# Altium PCB dsPIC33_CPU_ETH100(64)_Unit.PcbDoc
Units mm, origin at the board's own origin, x right, y up, seen from the top; angles counter-clockwise.
Board outline 83.82 x 124.46 mm, 2 copper layers (Top Layer, Bottom Layer); 43 components, 105 nets, 350 pads, 189 vias.
Unrouted connection lines stored in the file: 3.
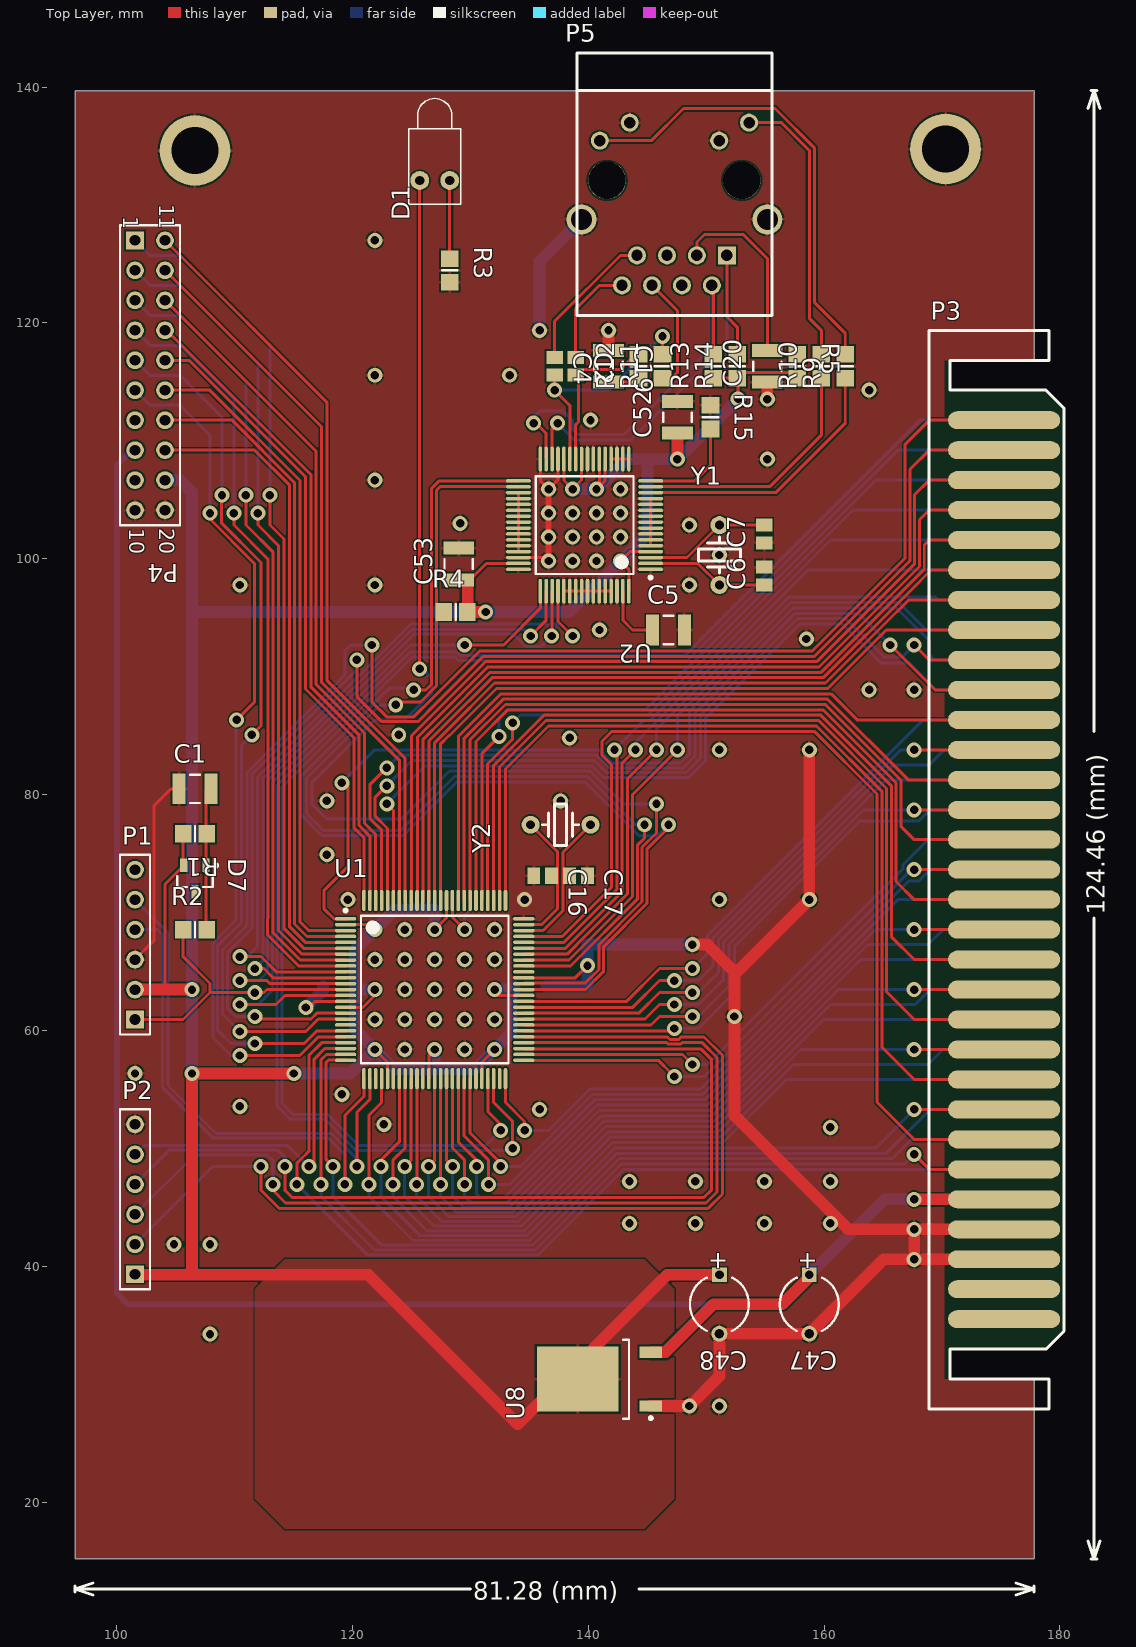
[diagram p0: Top Layer view]
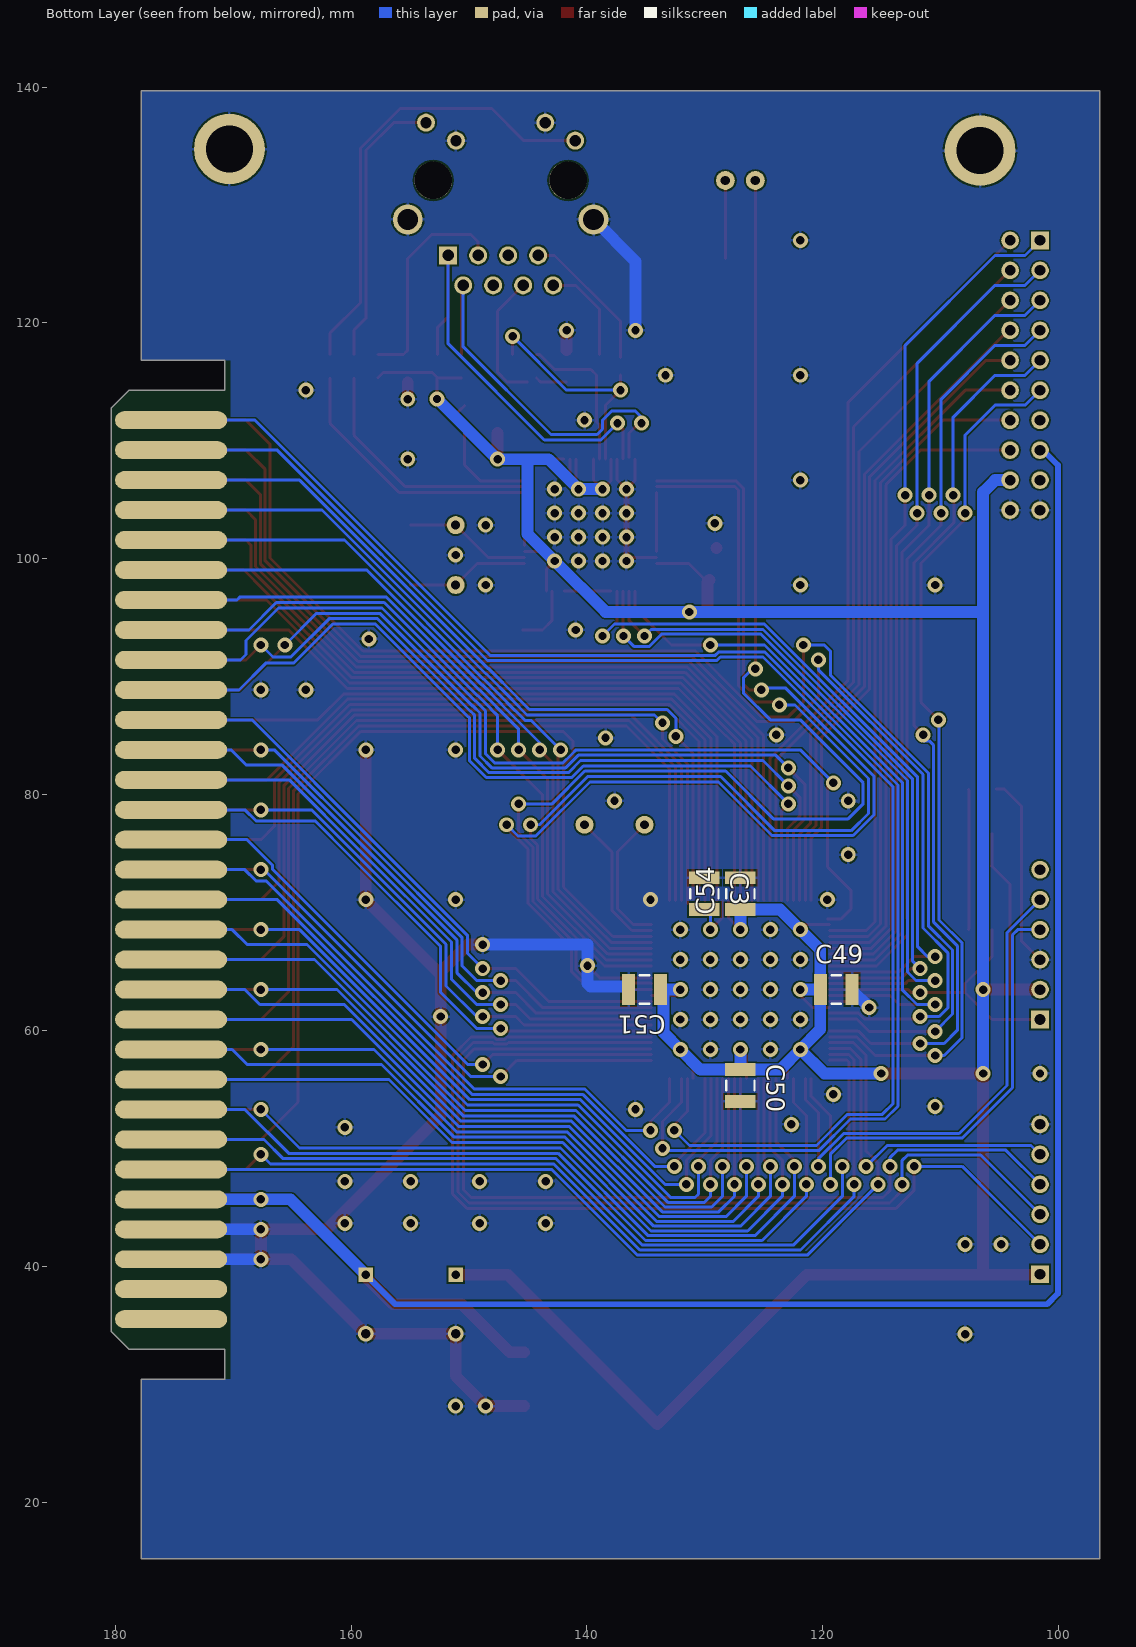
[diagram p1: Bottom Layer view, seen from below]

## Layer stack, top to bottom
Top Layer: signal copper 0.0356
Dielectric: core 0.32, FR-4, Dk 4.8
Bottom Layer: signal copper 0.0356

## Board outline
177.8,139.7 177.8,116.84 170.688,116.84 170.688,114.3 178.816,114.3 180.34,112.776 180.34,34.544 178.816,33.02 170.688,33.02 170.688,30.48 177.8,30.48 177.8,15.24 96.52,15.24 96.52,139.7

## Design rules (kind name [scope] priority, off if disabled: settings)
Clearance [All] p1: gap=0.15
PolygonConnect [All] p1: connectstyle=Relief reliefconductorwidth=0.254 reliefentries=4 polygonreliefangle="90 Angle"
RoomDefinition dsPIC33_CPU_ETH100(64)_Unit [InComponentClass('dsPIC33_CPU_ETH100(64)_Unit')] p1: confinementstyle=ConfineOut formatcopy=TRUE lockcomponents=FALSE outline 181.356,16.764 200.914,16.764 200.914,22.352 181.356,22.352
RoutingVias [All] p1: holewidth=0.711 width=1.27 viastyle="Through Hole" minholewidth=0.3 minwidth=0.8 maxholewidth=0.711 maxwidth=1.27
SMDNeckDown [All] p1: percent=200.000
SilkscreenOverComponentPads [All] p1: minsilkscreentomaskgap=0.254
SolderMaskExpansion [All] p1: expansion=0.102
Width [All] p1: maxlimit=1 minlimit=0.15 preferedwidth=0.254
27 further rules are at their usual default settings.

## Components (designator, comment, footprint, x,y, rotation, side; value= is the part's Value field where it differs from the comment)
C1 "Cap" CAPC3225L 106.68,80.518 r0 top
C2 "Cap" CAPC2012L 138.938,116.332 r270 top
C3 "Cap" CAPC3225L 130.048,71.628 r270 bottom
C4 "Cap" CAPC2012L 137.16,116.332 r270 top
C5 "Cap" CAPC3225L 146.812,93.98 r0 top
C6 "Cap" CAPC2012L 154.94,98.552 r90 top
C7 "Cap" CAPC2012L 154.94,102.108 r90 top
C16 "Cap" CAPC2012L 136.144,73.152 r0 top
C17 "Cap" CAPC2012L 139.192,73.152 r0 top
C19 "Cap" CAPC3225L 141.732,116.332 r270 top
C20 "Cap" CAPC3225L 155.194,116.332 r90 top
C47 "Cap Pol1" CAPPR5-5x5 158.75,36.83 r270 top
C48 "Cap Pol1" CAPPR5-5x5 151.13,36.83 r270 top
C49 "Cap" CAPC3225L 118.872,63.5 r180 bottom
C50 "Cap" CAPC3225L 127,55.372 r270 bottom
C51 "Cap" CAPC3225L 135.128,63.5 r0 bottom
C52 "Cap" CAPC3225L 147.574,112.014 r90 top
C53 "Cap" CAPC3225L 129.032,99.568 r90 top
C54 "Cap" CAPC3225L 127,71.628 r90 bottom
D1 "LED1" LED-1 127,132.08 r90 top
D7 "Diode" SOT95P240-3N 106.68,72.898 r270 top
P1 "Программатор" HDR1X6 101.6,60.96 r90 top
P2 "SPI" HDR1X6 101.6,39.37 r90 top
P3 "31x2 Slot" SL-62 180.34,33.02 r90 top
P4 "Header 10X2A" HDR2X10_CEN 101.6,127 r270 top
P5 "LU1T516-43" EthernetCON 147.32,132.08 r90 top
R1 "Res2" RESC2012M 106.68,76.708 r180 top
R2 "Res2" RESC2012M 106.68,68.58 r0 top
R3 "Res2" RESC2012M 128.27,124.46 r270 top
R4 "Res2" RESC2012M 128.778,95.504 r180 top
R5 "Res2" RESC2012M 157.734,116.332 r270 top
R9 "Res2" RESC2012M 161.798,116.332 r90 top
R10 "Res2" RESC2012M 159.766,116.332 r90 top
R11 "Res2" RESC2012M 146.304,116.332 r90 top
R12 "Res2" RESC2012M 144.272,116.332 r90 top
R13 "Res2" RESC2012M 150.622,116.332 r90 top
R14 "Res2" RESC2012M 152.654,116.332 r90 top
R15 "Res2" RESC2012M 150.368,112.014 r270 top
U1 "DSPIC33FJ256MC710T-I/PF" TQFP-PF100_N 127,63.5 r0 top
U2 "ENC624J600" TQFP-64_M 139.7,102.87 r180 top
U8 "LM1117DT-3.3" TD03B_N 140.97,30.48 r180 top
Y1 "XTAL" Quartz 151.13,97.79 r90 top
Y2 "XTAL" Quartz 140.208,77.47 r180 top

## Footprints (in the part's own frame and the unit in brackets; to place one, negate y for a bottom-side part, rotate by r counter-clockwise, add the part's x,y. Pads: shape width x height; smd on the part's side, far side on the other; paste and mask are expansions set on the pad)
CAPC2012L [mm] "Chip Capacitor, Body 2.0x1.3mm, IPC High Density"
  rect 1.1x1.4 smd: 1(-0.75,0) 2(0.75,0)
  body extent -1.1,-0.72 1.1,0.72, height 1.4
CAPC3225L [mm] "Chip Capacitor, Body 3.2x2.5mm, IPC High Density"
  rect 1.1x2.6 smd: 1(-1.35,0) 2(1.35,0)
  silkscreen extent -0.4,-1.2 0.4,1.2, body extent -1.7,-1.35 1.7,1.35, height 1.5
CAPPR5-5x5 [mm] "Capacitor, Electrolytic, Radial; Body 5 x 5 mm (Dia.xH typ); Pin Spacing 5 mm (typ)"
  rect 1.25x1.25 hole 0.75: 1(-2.5,0)
  round 1.35 hole 0.8: 2(2.5,0)
  silkscreen extent -2.26,-2.5 2.27,2.5
EthernetCON [mil] "Ethernet connector w/two LEDs"
  rect 60x60 hole 38: 1(-250,-175)
  round 60 hole 38: 2(-350,-125) 3(-250,-75) 4(-350,-25) 5(-250,25) 6(-350,75) 7(-250,125) 8(-350,175) 9(193,-249) 10(133,-149) 11(193,149) 12(133,249)
  round 100 hole 70: 13(-130,-310) 14(-130,310)
  round 125 hole 125 unplated: 15(0,-225) 16(0,225)
  silkscreen extent -450,-325 425,325, body extent -450,-325 433,325, height 550
HDR1X6 [mm] "Connector; Header; 6 Position"
  rect 1.5x1.5 hole 0.9: 1(0,0)
  round 1.5 hole 0.9: 2(2.54,0) 3(5.08,0) 4(7.62,0) 5(10.16,0) 6(12.7,0)
  silkscreen extent -1.27,-1.27 13.97,1.27
HDR2X10_CEN [mm] "Connector; Header; 10x2 Position"
  rect 1.5x1.5 hole 0.9: 1(0,0)
  round 1.5 hole 0.9: 2(2.54,0) 3(5.08,0) 4(7.62,0) 5(10.16,0) 6(12.7,0) 7(15.24,0) 8(17.78,0) 9(20.32,0) 10(22.86,0) 11(0,2.54) 12(2.54,2.54) 13(5.08,2.54) 14(7.62,2.54) 15(10.16,2.54) 16(12.7,2.54) 17(15.24,2.54) 18(17.78,2.54) 19(20.32,2.54) 20(22.86,2.54)
  silkscreen extent -1.27,-1.27 24.13,3.81
LED-1 [mm] "Typical RED GaAs LED; 2 Leads"
  round 1.6 hole 0.8: 1(0,1.27) 2(0,-1.27)
  silkscreen extent -2,-2.2 6.95,2.2
Quartz [mil]
  round 60 hole 30: 1(0,0) 2(200,0)
  silkscreen extent 40,-70 160,70, body extent -100,-100 300,100, height 90
RESC2012M [mm] "Chip Resistor, Body 2.0x1.2mm, IPC Low Density"
  rect 1.4x1.5 smd: 1(-1,0) 2(1,0)
  silkscreen extent 0,-0.65 0,0.65, body extent -1.07,-0.7 1.07,0.7, height 0.7
SL-62 [mm]
  oval 1.524x9.5 smd: 1(2.54,5.08) 2(5.08,5.08) 3(7.62,5.08) 4(10.16,5.08) 5(12.7,5.08) 6(15.24,5.08) 7(17.78,5.08) 8(20.32,5.08) 9(22.86,5.08) 10(25.4,5.08) 11(27.94,5.08) 12(30.48,5.08) 13(33.02,5.08) 14(35.56,5.08) 15(38.1,5.08) 16(40.64,5.08) 17(43.18,5.08) 18(45.72,5.08) 19(48.26,5.08) 20(50.8,5.08) 21(53.34,5.08) 22(55.88,5.08) 23(58.42,5.08) 24(60.96,5.08) 25(63.5,5.08) 26(66.04,5.08) 27(68.58,5.08) 28(71.12,5.08) 29(73.66,5.08) 30(76.2,5.08) 31(78.74,5.08)
  oval 1.524x9.5 smd far side: 32(2.54,5.08) 33(5.08,5.08) 34(7.62,5.08) 35(10.16,5.08) 36(12.7,5.08) 37(15.24,5.08) 38(17.78,5.08) 39(20.32,5.08) 40(22.86,5.08) 41(25.4,5.08) 42(27.94,5.08) 43(30.48,5.08) 44(33.02,5.08) 45(35.56,5.08) 46(38.1,5.08) 47(40.64,5.08) 48(43.18,5.08) 49(45.72,5.08) 50(48.26,5.08) 51(50.8,5.08) 52(53.34,5.08) 53(55.88,5.08) 54(58.42,5.08) 55(60.96,5.08) 56(63.5,5.08) 57(66.04,5.08) 58(68.58,5.08) 59(71.12,5.08) 60(73.66,5.08) 61(76.2,5.08) 62(78.74,5.08)
  silkscreen extent -5.08,0 86.36,11.43
SOT95P240-3N [mm] "SOT23, 3-Leads, Body 2.9x1.3mm, Pitch 0.95mm, Lead Span 2.4mm, IPC Medium Density"
  rect 1.15x0.6 smd: 1(-1.125,0.95) 2(-1.125,-0.95) 3(1.125,0)
  silkscreen extent -1.25,-1.5 0.7,1.93, body extent -0.7,-1.5 0.7,1.5, height 1.14
TD03B_N [mm] "D-PAK, 4-Leads, Body 6.1x6.6mm, Pitch 2.29mm, Lead Span 9.7mm, IPC Medium Density"
  rect 1.9x0.95 smd: 1(-4.35,2.28) 3(-4.35,-2.28)
  rect 6.9x5.5 smd: 4(1.85,0)
  silkscreen extent -4.47,-3.35 -2,3.43, body extent -2.5,-3.35 3.7,3.35, height 2.38
TQFP-64_M [mm] "64-Pin Thin Plastic Quad Flat Pack 0.5 mm Pitch, 1.0/0.1 mm Lead Form, IPC Low Density"
  oval 2.1x0.3 smd: 1(-5.6,3.75) 2(-5.6,3.25) 3(-5.6,2.75) 4(-5.6,2.25) 5(-5.6,1.75) 6(-5.6,1.25) 7(-5.6,0.75) 8(-5.6,0.25) 9(-5.6,-0.25) 10(-5.6,-0.75) 11(-5.6,-1.25) 12(-5.6,-1.75) 13(-5.6,-2.25) 14(-5.6,-2.75) 15(-5.6,-3.25) 16(-5.6,-3.75) 33(5.6,-3.75) 34(5.6,-3.25) 35(5.6,-2.75) 36(5.6,-2.25) 37(5.6,-1.75) 38(5.6,-1.25) 39(5.6,-0.75) 40(5.6,-0.25) 41(5.6,0.25) 42(5.6,0.75) 43(5.6,1.25) 44(5.6,1.75) 45(5.6,2.25) 46(5.6,2.75) 47(5.6,3.25) 48(5.6,3.75)
  oval 0.3x2.1 smd: 17(-3.75,-5.6) 18(-3.25,-5.6) 19(-2.75,-5.6) 20(-2.25,-5.6) 21(-1.75,-5.6) 22(-1.25,-5.6) 23(-0.75,-5.6) 24(-0.25,-5.6) 25(0.25,-5.6) 26(0.75,-5.6) 27(1.25,-5.6) 28(1.75,-5.6) 29(2.25,-5.6) 30(2.75,-5.6) 31(3.25,-5.6) 32(3.75,-5.6) 49(3.75,5.6) 50(3.25,5.6) 51(2.75,5.6) 52(2.25,5.6) 53(1.75,5.6) 54(1.25,5.6) 55(0.75,5.6) 56(0.25,5.6) 57(-0.25,5.6) 58(-0.75,5.6) 59(-1.25,5.6) 60(-1.75,5.6) 61(-2.25,5.6) 62(-2.75,5.6) 63(-3.25,5.6) 64(-3.75,5.6)
  silkscreen extent -5.72,-4.15 4.15,4.57, body extent -5,-5 5,5, height 1.2
TQFP-PF100_N [mm] "Thin QFP, 100-Leads, Body 14x14mm, Pitch 0.5mm, IPC Medium Density"
  oval 1.8x0.3 smd: 1(-7.55,6) 2(-7.55,5.5) 3(-7.55,5) 4(-7.55,4.5) 5(-7.55,4) 6(-7.55,3.5) 7(-7.55,3) 8(-7.55,2.5) 9(-7.55,2) 10(-7.55,1.5) 11(-7.55,1) 12(-7.55,0.5) 13(-7.55,0) 14(-7.55,-0.5) 15(-7.55,-1) 16(-7.55,-1.5) 17(-7.55,-2) 18(-7.55,-2.5) 19(-7.55,-3) 20(-7.55,-3.5) 21(-7.55,-4) 22(-7.55,-4.5) 23(-7.55,-5) 24(-7.55,-5.5) 25(-7.55,-6) 51(7.55,-6) 52(7.55,-5.5) 53(7.55,-5) 54(7.55,-4.5) 55(7.55,-4) 56(7.55,-3.5) 57(7.55,-3) 58(7.55,-2.5) 59(7.55,-2) 60(7.55,-1.5) 61(7.55,-1) 62(7.55,-0.5) 63(7.55,0) 64(7.55,0.5) 65(7.55,1) 66(7.55,1.5) 67(7.55,2) 68(7.55,2.5) 69(7.55,3) 70(7.55,3.5) 71(7.55,4) 72(7.55,4.5) 73(7.55,5) 74(7.55,5.5) 75(7.55,6)
  oval 0.3x1.8 smd: 26(-6,-7.55) 27(-5.5,-7.55) 28(-5,-7.55) 29(-4.5,-7.55) 30(-4,-7.55) 31(-3.5,-7.55) 32(-3,-7.55) 33(-2.5,-7.55) 34(-2,-7.55) 35(-1.5,-7.55) 36(-1,-7.55) 37(-0.5,-7.55) 38(0,-7.55) 39(0.5,-7.55) 40(1,-7.55) 41(1.5,-7.55) 42(2,-7.55) 43(2.5,-7.55) 44(3,-7.55) 45(3.5,-7.55) 46(4,-7.55) 47(4.5,-7.55) 48(5,-7.55) 49(5.5,-7.55) 50(6,-7.55) 76(6,7.55) 77(5.5,7.55) 78(5,7.55) 79(4.5,7.55) 80(4,7.55) 81(3.5,7.55) 82(3,7.55) 83(2.5,7.55) 84(2,7.55) 85(1.5,7.55) 86(1,7.55) 87(0.5,7.55) 88(0,7.55) 89(-0.5,7.55) 90(-1,7.55) 91(-1.5,7.55) 92(-2,7.55) 93(-2.5,7.55) 94(-3,7.55) 95(-3.5,7.55) 96(-4,7.55) 97(-4.5,7.55) 98(-5,7.55) 99(-5.5,7.55) 100(-6,7.55)
  silkscreen extent -7.67,-6.25 6.25,6.82, body extent -7,-7 7,7, height 1.2

## Part data
C1 C2 C3 C4 C5 C6 C7 C16 C17 C19 C20 C49 C50 C51 C52 C53 C54: "Capacitor"
C47 C48: "Polarized Capacitor (Radial)"
D1: "Typical RED GaAs LED"
D7: "Default Diode"
P1 P2: library part "Header 6", "Header, 6-Pin"
P4: "Header, 10-Pin, Dual row"
R1 R2 R3 R4 R5 R9 R10 R11 R12 R13 R14 R15: "Resistor"
U1: "High-Performance 16-bit Digital Signal Controller, 256 KB Flash, 30 KB RAM, 100-Pin TQFP, Industrial Temperature, Tape and Reel"
U8: "800mA Low-Dropout Linear Regulator"
Y1 Y2: "Crystal Oscillator"

## Free pads (board coordinates)
  round 6 hole 4: 0(106.68,134.62) 0(170.307,134.747)

## Via types
v1: diameter 1.27, hole 0.711, Top Layer to Bottom Layer, 189 vias

## Nets (pads, with @x,y where several pads share a name; then routed paths per layer and width w, separated by ;. In a path a pad name is that pad's centre, name@x,y a point inside that pad or via, vN(x,y) a via of type N, cw(c..) or ccw(c..) an arc to the next point about the centre after c; other vN are vias at no path point)
+5: C47.1 P3.5 P3.36 P4.8 U8.3 | length 175.4
  Top Layer w1: U8.3 146.552,32.76 150.622,36.83 151.13,36.83 156.464,36.83 158.75,39.116 C47.1 ; v1(167.64,45.72) P3.5
  Bottom Layer w0.5: P4.8 101.346,109.22 100.076,107.95 100.076,37.748 100.994,36.83 145.288,36.83 156.25,36.83 C47.1
  Bottom Layer w1: C47.1 165.14,45.72 v1(167.64,45.72) P3.36
+30: P3.1 P3.2 P3.32 P3.33
A0: P4.1 U1.6 | length 71
  Top Layer w0.254: v1(113.03,105.41) 113.03,102.87 114.217,101.683 114.217,68.977 114.208,68.968 114.208,68.687 115.895,67 U1.6
  Bottom Layer w0.254: P4.1 102.87,125.73 105.41,125.73 113.03,118.11 v1(113.03,105.41)
DB0: P4.11 U1.93 | length 64.4
  Top Layer w0.254: P4.11 117.856,113.284 117.856,89.726 124.5,83.082 U1.93 U1.93@124.523,71.073
DB1: P4.12 U1.94 | length 61.7
  Top Layer w0.254: P4.12 117.402,111.198 117.402,89.538 124,82.94 U1.94 U1.94@124.023,71.073
DB2: P4.13 U1.98 | length 58.3
  Top Layer w0.254: P4.13 116.948,109.112 116.948,89.35 121.05,85.248 121.05,77.592 122,76.642 U1.98
DB3: P4.14 U1.99 | length 55.6
  Top Layer w0.254: P4.14 104.274,119.38 116.494,107.16 116.494,89.162 120.596,85.06 120.596,77.404 121.5,76.5 U1.99
DB4: P4.15 U1.100 | length 54
  Top Layer w0.254: P4.15 106.172,116.84 116.04,106.972 116.04,88.974 120.142,84.872 120.142,77.216 121,76.358 U1.100
DB5: P4.16 U1.3 | length 56.2
  Top Layer w0.254: P4.16 107.936,114.3 115.579,106.657 115.579,69.243 116.322,68.5 U1.3
DB6: P4.17 U1.4 | length 55.4
  Top Layer w0.254: P4.17 109.834,111.76 115.125,106.469 115.125,69.055 116.179,68 U1.4
DB7: P4.18 U1.5 | length 54.5
  Top Layer w0.254: P4.18 111.732,109.22 114.671,106.281 114.671,68.866 116.037,67.5 U1.5
DISPE: P4.3 U1.8 | length 67.1
  Top Layer w0.254: v1(110.998,105.41) 110.998,102.87 113.309,100.559 113.309,69.353 113.3,69.344 113.3,68.311 115.611,66 U1.8
  Bottom Layer w0.254: P4.3 102.87,120.65 105.41,120.65 110.998,115.062 v1(110.998,105.41)
DISPRESET: P4.4 U1.9 | length 65.1
  Top Layer w0.254: v1(109.982,103.886) 109.982,102.87 112.855,99.997 112.855,69.541 112.846,69.532 112.846,68.123 115.469,65.5 U1.9
  Bottom Layer w0.254: P4.4 102.87,118.11 105.41,118.11 109.982,113.538 v1(109.982,103.886)
DRV_DIR_A: P3.37 U1.22 | length 80.3
  Top Layer w0.254: v1(115.316,46.99) 115.316,48.788 115.954,49.426 115.974,49.426 116.332,49.784 116.332,57.912 117.42,59 U1.22
  Bottom Layer w0.254: v1(115.316,46.99) 121.285,41.021 135.763,41.021 143.002,48.26 165.664,48.26 169,48.26 P3.37
DRV_DIR_B: P3.39 U1.29 | length 70.4
  Top Layer w0.254: v1(121.412,46.99) 121.412,52.832 122.5,53.92 U1.29
  Bottom Layer w0.254: v1(121.412,46.99) 121.412,45.974 125.153,42.233 135.049,42.233 142.438,49.622 165.282,49.622 169,53.34 P3.39
DRV_DIR_C: P3.41 U1.34 | length 68.3
  Top Layer w0.254: v1(124.46,48.514) 125,49.054 U1.34
  Bottom Layer w0.254: v1(124.46,48.514) 124.46,45.974 126.989,43.445 134.335,43.445 141.874,50.984 151.25,50.984 157.416,57.15 168.805,57.15 170.075,58.42 P3.41
DRV_DIR_D: P3.43 U1.39 | length 66.1
  Top Layer w0.254: v1(127.5,46.99) U1.39
  Bottom Layer w0.254: v1(127.5,46.99) 127.5,45.982 128.825,44.657 133.621,44.657 141.31,52.346 150.686,52.346 160.57,62.23 167.73,62.23 169,63.5 P3.43
DRV_DIR_E: P3.45 U1.42 | length 64.7
  Top Layer w0.254: U1.42 129,50.578 130.556,49.022 v1(130.556,48.514)
  Bottom Layer w0.254: v1(130.556,48.514) 130.556,46.152 130.839,45.869 132.906,45.869 140.745,53.708 150.122,53.708 163.724,67.31 167.386,67.31 168.805,67.31 170.075,68.58 P3.45
DRV_DIR_F: P3.47 U1.50 | length 54.9
  Top Layer w0.254: U1.50 133,53.944 134.62,52.324 v1(134.62,51.562)
  Bottom Layer w0.254: v1(134.62,51.562) 136.673,51.562 140.181,55.07 149.558,55.07 167.186,72.698 168.038,72.698 169,73.66 P3.47
DRV_DIR_G: P3.49 U1.56 | length 50.8
  Top Layer w0.254: U1.56 143.566,60 147.122,60 v1(147.32,60.198)
  Bottom Layer w0.254: v1(147.32,60.198) 149.352,60.198 152.4,63.246 152.4,67.148 160.082,74.83 163.03,77.778 168.038,77.778 169,78.74 P3.49
DRV_DIR_H: P3.51 U1.59 | length 51.6
  Top Layer w0.254: U1.59 144.304,61.5 146.05,63.246 v1(148.844,63.246)
  Bottom Layer w0.254: v1(148.844,63.246) 149.352,63.246 151.038,64.932 151.038,67.712 158.72,75.394 165.876,82.55 168.91,82.55 170.18,83.82 P3.51
DRV_ENA_A: P3.38 U1.25 | length 75.7
  Top Layer w0.254: v1(118.364,48.514) 117.802,49.076 117.802,57.336 117.989,57.523 119.427,57.523 U1.25
  Bottom Layer w0.254: v1(118.364,48.514) 118.364,45.974 122.509,41.829 135.287,41.829 142.626,49.168 165.754,49.168 167.386,50.8 168.82,50.8 P3.38
DRV_ENA_B: P3.40 U1.33 | length 68.8
  Top Layer w0.254: v1(123.444,46.99) 123.444,49.022 124.5,50.078 U1.33
  Bottom Layer w0.254: v1(123.444,46.99) 123.444,45.974 126.377,43.041 134.573,43.041 142.062,50.53 151.439,50.53 156.789,55.88 168.82,55.88 P3.40
DRV_ENA_C: P3.42 U1.38 | length 66.6
  Top Layer w0.254: v1(126.492,48.514) 127,49.022 U1.38
  Bottom Layer w0.254: v1(126.492,48.514) 126.492,45.974 128.213,44.253 133.859,44.253 141.498,51.892 150.874,51.892 159.942,60.96 168.177,60.96 P3.42
DRV_ENA_D: P3.44 U1.41 | length 64.9
  Top Layer w0.254: U1.41 128.5,50.062 129.54,49.022 v1(129.54,46.99)
  Bottom Layer w0.254: v1(129.54,46.99) 129.54,45.974 130.049,45.465 133.144,45.465 140.933,53.254 150.31,53.254 163.096,66.04 P3.44
DRV_ENA_E: P3.46 U1.44 | length 60.5
  Top Layer w0.254: U1.44 130,51.356 132.588,48.768 v1(132.588,48.514)
  Bottom Layer w0.254: v1(132.588,48.514) 134.267,48.514 140.369,54.616 149.746,54.616 166.25,71.12 168.177,71.12 P3.46
DRV_ENA_F: P3.48 U1.52 | length 49.7
  Top Layer w0.254: U1.52 141.002,58 147.994,58 148.59,57.404 148.59,56.896 v1(148.844,57.15)
  Bottom Layer w0.254: v1(148.844,57.15) 150.114,57.15 154.432,61.468 166.678,73.714 166.678,74.058 168.82,76.2 P3.48
DRV_ENA_G: P3.50 U1.58 | length 51
  Top Layer w0.254: U1.58 144.82,61 146.05,62.23 v1(147.32,62.23)
  Bottom Layer w0.254: v1(147.32,62.23) 149.352,62.23 151.492,64.37 151.492,67.524 159.174,75.206 165.248,81.28 P3.50
DRV_ENA_H: P3.52 U1.61 | length 51.5
  Top Layer w0.254: U1.61 143.272,62.5 146.05,65.278 v1(148.844,65.278)
  Bottom Layer w0.254: v1(148.844,65.278) 150.114,66.548 150.114,68.072 157.812,75.77 168.402,86.36 P3.52
DRV_HOME_A: P3.6 U1.24 | length 77.5
  Top Layer w0.254: v1(117.348,46.99) 117.348,52.07 117.348,57.524 117.824,58 U1.24 ; v1(167.64,49.53) 168.91,48.26 P3.6
  Bottom Layer w0.254: v1(117.348,46.99) 117.348,45.974 121.897,41.425 135.525,41.425 142.814,48.714 165.852,48.714 166.824,48.714 v1(167.64,49.53)
DRV_HOME_B: P3.8 U1.32 | length 69.3
  Top Layer w0.254: v1(122.428,48.514) 122.428,49.022 124,50.594 U1.32 ; v1(167.64,53.34) P3.8
  Bottom Layer w0.254: v1(122.428,48.514) 122.428,45.974 125.765,42.637 134.811,42.637 142.25,50.076 164.376,50.076 v1(167.64,53.34)
DRV_HOME_C: P3.10 U1.35 | length 66.7
  Top Layer w0.254: v1(125.476,46.99) 125.476,47.498 125.5,47.522 125.5,50.824 U1.35 ; v1(167.64,58.42) P3.10
  Bottom Layer w0.254: v1(125.476,46.99) 125.476,45.974 127.601,43.849 134.097,43.849 141.686,51.438 151.062,51.438 158.044,58.42 v1(167.64,58.42)
DRV_HOME_D: P3.12 U1.40 | length 64.9
  Top Layer w0.254: U1.40 128,49.038 v1(128.524,48.514) ; v1(167.64,63.5) P3.12
  Bottom Layer w0.254: v1(128.524,48.514) 128.524,45.974 129.437,45.061 133.382,45.061 141.121,52.8 150.498,52.8 161.198,63.5 v1(167.64,63.5)
DRV_HOME_E: P3.14 U1.43 | length 63
  Top Layer w0.254: U1.43 129.5,51.094 131.572,49.022 v1(131.572,46.99) ; v1(167.64,68.58) P3.14
  Bottom Layer w0.254: v1(131.572,46.99) 133.385,46.99 140.557,54.162 149.934,54.162 164.352,68.58 167.278,68.58 167.64,68.942 v1(167.64,68.58)
DRV_HOME_F: P3.16 U1.51 | length 48.8
  Top Layer w0.254: U1.51 145.954,57.5 147.066,56.388 147.066,56.134 v1@147.32,55.88 ; v1(167.64,73.66) P3.16
  Bottom Layer w0.254: v1(147.32,56.134) 149.86,56.134 v1@167.513,73.787 ; v1@167.602,73.698 v1(167.64,73.66)
DRV_HOME_G: P3.18 U1.57 | length 50.3
  Top Layer w0.254: U1.57 145.336,60.5 146.05,61.214 v1(148.844,61.214) ; v1(167.64,78.74) P3.18
  Bottom Layer w0.254: v1(148.844,61.214) 149.352,61.214 151.946,63.808 151.946,67.336 159.628,75.018 163.35,78.74 v1(167.64,78.74)
DRV_HOME_H: P3.20 U1.60 | length 51.2
  Top Layer w0.254: U1.60 143.788,62 146.05,64.262 v1(147.32,64.262) ; v1(167.64,83.82) P3.20
  Bottom Layer w0.254: v1(147.32,64.262) 149.352,64.262 150.584,65.494 150.584,67.9 158.266,75.582 166.504,83.82 v1(167.64,83.82)
DRV_MS1: P3.23 U1.96 | length 74
  Top Layer w0.254: v1(122.936,80.772) 121.958,79.794 121.958,78.194 123,77.152 U1.96 ; v1(167.64,92.71) 168.91,91.44 P3.23
  Bottom Layer w0.254: v1(122.936,80.772) 125.076,82.912 140.546,82.912 141.571,81.887 148.301,81.887 149.517,83.103 149.517,86.75 149.828,87.062 149.871,87.062 157.751,94.942 161.852,94.942 165.1,91.694 166.624,91.694 v1(167.64,92.71)
DRV_MS2: P3.22 U1.97 | length 75.7
  Top Layer w0.254: U1.97 122.5,77.01 121.504,78.006 121.504,80.864 v1(122.936,82.296) ; v1(165.608,92.71) 169.418,88.9 P3.22
  Bottom Layer w0.254: v1(122.936,82.296) 124.006,83.366 140.734,83.366 140.824,83.276 141.809,82.291 148.063,82.291 149.063,83.291 149.063,86.938 149.64,87.516 149.682,87.516 157.562,95.396 162.922,95.396 v1(165.608,92.71)
DRV_RESET: P3.54 U1.1 | length 82.1
  Top Layer w0.254: v1(119.126,81.026) 119.38,81.026 119.634,80.772 119.634,73.914 117.602,71.882 117.602,70.358 118.46,69.5 U1.1@119.634,69.5
  Bottom Layer w0.254: v1(119.126,81.026) 121.92,83.82 140.922,83.82 141.278,83.464 142.047,82.695 147.825,82.695 148.609,83.479 148.609,87.127 149.452,87.97 149.494,87.97 157.374,95.85 166.144,95.85 168.91,93.084 168.91,91.897 169.367,91.44 P3.54
DRV_SLEEP: P3.53 U1.95 | length 72.8
  Top Layer w0.254: v1(122.936,79.248) 123.5,78.684 U1.95
  Bottom Layer w0.254: v1@122.809,79.375 v1@123.317,79.375 ; v1(122.936,79.248) 126.146,82.458 140.315,82.458 141.29,81.483 148.539,81.483 149.971,82.915 149.971,86.562 150.016,86.608 150.059,86.608 157.939,94.488 161.544,94.488 164.871,91.161 167.234,91.161 169.494,88.9 P3.53
DRV_STEP_A: P3.7 U1.72 | length 85.9
  Top Layer w0.254: U1.72 137.808,68 138.554,68.746 141.986,72.178 141.986,82.55 141.186,83.35 141.186,84.544 142.034,85.392 159.168,85.392 164.488,80.072 164.488,53.952 167.64,50.8 P3.7
DRV_STEP_B: P3.9 U1.76 | length 80
  Top Layer w0.254: U1.76 133,82.2 136.646,85.846 159.356,85.846 164.892,80.31 164.892,58.628 167.64,55.88 P3.9
DRV_STEP_C: P3.11 U1.77 | length 76.3
  Top Layer w0.254: U1.77 132.5,82.357 136.443,86.3 159.544,86.3 165.296,80.548 165.296,63.304 167.64,60.96 P3.11
DRV_STEP_D: P3.13 U1.78 | length 72.6
  Top Layer w0.254: U1.78 132,82.499 136.255,86.754 159.732,86.754 165.7,80.786 165.7,67.98 167.64,66.04 P3.13
DRV_STEP_E: P3.15 U1.81 | length 70.9
  Top Layer w0.254: U1.81 130.5,84.526 133.182,87.208 159.92,87.208 166.104,81.024 166.104,72.656 167.64,71.12 P3.15
DRV_STEP_F: P3.17 U1.82 | length 67.2
  Top Layer w0.254: U1.82 130,84.668 132.994,87.662 160.108,87.662 166.508,81.262 166.508,77.332 167.64,76.2 P3.17
DRV_STEP_G: P3.19 U1.83 | length 63.7
  Top Layer w0.254: U1.83 129.5,84.81 132.806,88.116 160.296,88.116 167.132,81.28 P3.19
DRV_STEP_H: P3.21 U1.84 | length 62.6
  Top Layer w0.254: U1.84 129,84.952 132.618,88.57 160.604,88.57 162.814,86.36 P3.21
E1: P4.6 U1.21 | length 74.6
  Top Layer w0.254: v1(107.95,103.886) 107.817,103.753 107.817,103.511 111.709,99.619 111.709,87.855 v1(110.214,86.36) ; v1(110.49,57.912) 115.57,57.912 117.158,59.5 U1.21
  Bottom Layer w0.254: P4.6 102.87,113.03 105.41,113.03 107.95,110.49 v1(107.95,103.886) ; v1(110.214,86.36) 110.16,86.306 110.16,69.4 108.204,67.444 108.204,59.436 109.728,57.912 v1(110.49,57.912)
E2: P4.5 U1.20 | length 76.2
  Top Layer w0.254: v1(108.966,105.41) 108.912,105.356 108.912,103.058 112.268,99.702 112.268,85.852 v1(111.506,85.09) ; v1(111.76,58.928) 115.944,58.928 117.016,60 U1.20
  Bottom Layer w0.254: P4.5 102.87,115.57 105.41,115.57 108.966,112.014 v1(108.966,105.41) ; v1(111.76,58.928) 109.728,58.928 108.608,60.048 108.608,67.206 110.614,69.212 110.614,84.198 110.998,84.582 111.506,84.582 v1@111.76,84.836
ESPI_SCK: U1.10 U2.52 | length 62.5
  Top Layer w0.254: v1(110.49,66.294) 112.268,66.294 113.562,65 U1.10 ; U2.52 137.45,94.706 v1(138.684,93.472)
  Bottom Layer w0.254: v1(110.49,66.294) 111.15,66.294 111.976,67.12 111.976,81.496 124.968,94.488 137.668,94.488 v1(138.684,93.472)
ESPI_SDI: U1.12 U2.51 | length 62.2
  Top Layer w0.254: v1(110.49,64.262) 112.768,64.262 113.03,64 U1.12 ; v1(136.906,93.472) 136.95,93.516 U2.51
  Bottom Layer w0.254: v1@110.544,64.316 v1(110.49,64.262) 112.104,64.262 112.834,64.992 112.834,81.211 125.245,93.622 133.688,93.622 134.75,92.56 135.994,92.56 v1(136.906,93.472) v1@137.16,93.218
ESPI_SDO: U1.11 U2.50 | length 56.9
  Top Layer w0.254: v1(111.76,65.278) 112.522,65.278 113.3,64.5 U1.11 ; v1(135.128,93.472) 136.45,94.794 U2.50
  Bottom Layer w0.254: v1(111.76,65.278) 112.43,65.948 112.43,81.379 125.077,94.026 134.574,94.026 v1(135.128,93.472)
ESPI_SS: U1.14 U2.49 | length 60.8
  Top Layer w0.254: v1(110.49,62.23) 113.538,62.23 114.308,63 U1.14 ; v1(129.54,92.71) 132.842,92.71 135.95,95.818 U2.49
  Bottom Layer w0.254: v1@110.594,62.334 v1(110.49,62.23) 112.034,62.23 113.238,63.434 113.238,81.001 124.947,92.71 129.032,92.71 129.286,92.456 v1(129.54,92.71)
ETH_INT: R4.2 U1.67 U2.34 | length 93
  Top Layer w0.254: v1(123.698,87.63) 123.952,87.884 125.793,87.884 127.15,89.241 127.15,96.001 127.15,105.814 127.456,106.12 U2.34 ; U1.67 138.518,65.5 144.175,71.157 144.175,75.595 144.175,75.722 144.78,76.327 v1(144.78,77.47)
  Bottom Layer w0.254: v1(123.698,87.63) 123.698,88.138 123.19,87.63 122.364,87.63 116.132,81.398 116.132,78.432 117.602,76.962 124.086,76.962 128.674,81.55 139.939,81.55 144.019,77.47 v1(144.78,77.47)
GND: C1.1 C3.1 C5.2 C6.2 C7.1 C16.1 C17.2 C19.1 C20.1 C47.2 C48.2 C49.2 C50.2 C51.2 C52.2 C53.2 C54.2 P1.3 P2.6 P3.3 P3.4 P3.34 P3.35 P4.10 P4.20 P5.10 P5.11 P5.13 P5.14 pad.0 R3.2 R15.1 U1.15 U1.31 U1.36 U1.45 U1.65 U1.75 U2.1 U2.5 U2.6 U2.7 U2.8 U2.9 U2.10 U2.11 U2.12 U2.13 U2.17 U2.18 U2.19 U2.20 U2.23 U2.24 U2.29 U2.32 U2.35 U2.36 U2.37 U2.38 U2.39 U2.40 U2.41 U2.42 U2.43 U2.44 U2.45 U2.46 U2.48 U2.53 U2.54 U2.55 U2.56 U2.57 U2.58 U2.59 U2.60 U2.61 U2.62 U8.1 | length 209.5
  Top Layer w0.254: P1.3 103.19,67.63 103.19,79.06 104.648,80.518 C1.1 ; v1(116.078,61.976) 116.332,61.722 116.332,61.976 116.856,62.5 U1.15 ; U2.46 v1@136.354,100.12 ; U2.45 U2.35 ; U1.65 138.922,64.5 v1(139.954,65.532) ; U2.32 135.95,106.62 v1(136.652,105.918) 137.45,106.716 U2.29 ; U2.53 U2.61 ; v1(140.716,99.822) v1@141.224,99.822 ; v1@140.95,94 v1(140.97,93.98) ; U2.20 U2.17 ; U2.5 U2.13 ; v1@148.34,103.12 v1(148.59,102.87) ; R15.1 R15.1@150.86,112.522 ; v1@155.194,113.284 v1(155.194,113.538)
  Top Layer w0.5: v1@136.354,100.12 v1(136.652,99.822) v1(136.652,105.918)
  Top Layer w1: C19.1 v1(141.732,119.38) ; U8.1 148.596,28.2 151.13,30.734 C48.2 153.67,34.33 C47.2 165.06,40.64 v1(167.64,40.64) ; v1(148.844,67.31) 150.114,67.31 152.4,65.024 152.4,64.77 ; v1(155.194,113.538) C20.1 ; v1(158.75,71.12) 152.4,64.77 ; v1(158.75,71.12) v1(158.75,83.82) ; P3.3 v1(167.64,40.64) ; P3.4 v1(167.64,43.18) ; 152.4,64.77 v1(152.4,61.214) 152.4,52.832 162.052,43.18 v1(167.64,43.18) ; v1(167.64,40.64) v1(167.64,43.18)
  Bottom Layer w1: v1@116.172,61.882 116.172,62.07 117.522,63.42 C49.2@117.522,63.754 ; v1(135.89,119.38) 135.89,125.222 P5.14 ; C51.2@136.478,63.754 139.7,63.754 139.954,64.008 v1(139.954,65.532) 139.954,67.31 v1(148.844,67.31) ; v1(167.64,40.64) P3.34 ; v1(167.64,43.18) P3.35
  other v1: 148.59,28.2 151.13,28.194 107.95,34.29 104.902,41.91 107.95,41.91 143.51,43.688 149.098,43.688 154.94,43.688 160.528,43.688 143.51,47.244 149.098,47.244 154.94,47.244 160.528,47.244 160.528,51.816 122.682,52.07 135.89,53.34 110.49,53.594 119.126,54.61 101.6,56.388 124.46,58.42 129.54,58.42 121.92,60.96 124.46,60.96 127,60.96 129.54,60.96 132.08,60.96 124.46,63.5 127,63.5 129.54,63.5 121.92,66.04 124.46,66.04 127,66.04 129.54,66.04 132.08,66.04 124.46,68.58 132.08,68.58 119.634,71.12 134.62,71.12 151.13,71.12 117.856,74.93 117.856,79.502 137.668,79.502 151.13,83.82 138.43,84.836 123.952,85.09 163.83,88.9 167.64,88.9 158.496,93.218 110.49,97.79 121.92,97.79 148.59,97.79 138.684,99.822 151.13,100.33 136.652,101.854 138.684,101.854 140.716,101.854 142.748,101.854 129.159,103.013 136.652,103.886 138.684,103.886 140.716,103.886 142.748,103.886 142.748,105.918 121.92,106.68 155.194,108.458 140.208,111.76 163.83,114.3 121.92,115.57 133.35,115.57 121.92,127
LEDA: R10.1 U2.15 | length 21.1
  Top Layer w0.254: U2.15 155.396,106.12 159.766,110.49 R10.1
LEDB: R9.1 U2.14 | length 22.8
  Top Layer w0.254: U2.14 155.912,105.62 161.798,111.506 R9.1
NetC1_2: C1.2 D7.1 R1.1 R2.2 | length 11.9
  Top Layer w0.254: R2.2 107.63,68.63 D7.1 107.63,80.418 C1.2@107.68,80.468
NetC2_1: C2.1 P5.8 | length 8.6
  Top Layer w0.254: C2.1@138.938,117.336 138.938,121.158 140.97,123.19 P5.8
NetC4_1: C4.1 P5.7 | length 12.4
  Top Layer w0.254: C4.1 137.16,120.142 142.748,125.73 P5.7
NetC6_1: C6.1 U2.2 Y1.1 | length 10.4
  Top Layer w0.254: U2.2 149.3,99.62 Y1.1 154.928,97.79 C6.1
NetC7_2: C7.2 U2.3 Y1.2 | length 10.8
  Top Layer w0.254: U2.3 148.38,100.12 Y1.2 151.142,102.858 C7.2
NetC16_2: C16.2 U1.74 Y2.2 | length 11.5
  Top Layer w0.254: U1.74 135.636,69 136.056,69 137.414,70.358 137.414,75.184 Y2.2
NetC17_1: C17.1 U1.73 Y2.1 | length 12.3
  Top Layer w0.254: U1.73 136.198,68.5 137.868,70.17 137.868,75.13 Y2.1
NetC19_2: C19.2 P5.6 R11.1 R12.1 | length 14.3
  Top Layer w0.254: C19.2 R12.1@143.922,114.982 ; 145.034,114.982 146.732,114.982 147.574,115.824 147.574,121.031 P5.6 ; R12.1@143.922,114.982 R12.1 R12.1@143.922,114.982
NetC20_2: C20.2 P5.3 R5.1 | length 18.7
  Top Layer w0.254: P5.3 149.225,126.873 149.86,127.508 153.162,127.508 155.194,125.476 C20.2 155.544,117.332 R5.1
NetD1_2: D1.2 R3.1 | length 6.6
  Top Layer w0.254: R3.1 D1.2
NetP5_9: P5.9 R10.2 | length 24.1
  Top Layer w0.254: P5.9@153.416,137.16 153.594,136.982 156.388,136.982 158.75,134.62 158.75,120.396 159.766,119.38 R10.2
NetP5_12: P5.12 R9.2 | length 39.3
  Top Layer w0.254: P5.12 145.364,135.458 148.082,138.176 155.836,138.176 159.204,134.808 159.204,121.72 161.798,119.126 R9.2
NULL_A: P3.31 U1.18 | length 124.1
  Top Layer w0.254: v1(110.49,59.944) 116.078,59.944 117.134,61 U1.18 ; v1(121.666,92.71) 121.666,87.884 122.936,86.614 125.222,86.614 126.896,88.288 130.81,92.202 159.004,92.202 166.878,100.076 166.878,109.728 168.91,111.76 P3.31
  Bottom Layer w0.254: v1(110.49,59.944) 109.012,61.422 109.012,66.848 111.068,68.904 111.068,81.858 119.38,90.17 119.38,92.202 119.888,92.71 v1(121.666,92.71)
NULL_B: P3.30 U1.17 | length 117.6
  Top Layer w0.254: v1(111.76,61.214) 111.96,61.014 116.506,61.014 116.992,61.5 U1.17 ; v1(120.396,91.44) 120.396,88.329 122.515,86.21 125.58,86.21 127.129,87.759 131.118,91.748 159.192,91.748 167.282,99.838 167.282,107.592 168.91,109.22 P3.30
  Bottom Layer w0.254: v1(111.76,61.214) 110.146,61.214 109.42,61.94 109.42,66.614 111.522,68.716 111.522,81.741 120.396,90.615 v1(120.396,91.44)
NULL_C: P3.29 U1.92 | length 76.6
  Top Layer w0.254: U1.92 125.023,71.073 125.023,85.011 127.317,87.305 131.306,91.294 159.38,91.294 167.686,99.6 167.686,105.456 168.91,106.68 P3.29
NULL_D: P3.28 U1.91 | length 73.9
  Top Layer w0.254: U1.91 125.523,71.073 125.523,84.869 127.505,86.851 131.494,90.84 159.568,90.84 168.09,99.362 168.09,103.32 168.91,104.14 P3.28
NULL_E: P3.27 U1.90 | length 71.1
  Top Layer w0.254: U1.90 126.023,71.073 126.023,84.727 127.693,86.397 131.682,90.386 159.756,90.386 168.494,99.124 168.494,101.184 168.91,101.6 P3.27
NULL_F: P3.26 U1.89 | length 68.3
  Top Layer w0.254: U1.89 126.523,71.073 126.523,84.585 127.881,85.943 131.87,89.932 159.944,89.932 167.37,97.358 169.072,99.06 P3.26
NULL_G: P3.25 U1.88 | length 66.6
  Top Layer w0.254: U1.88 127,84.42 128.07,85.489 132.058,89.478 160.132,89.478 165.088,94.434 167.174,96.52 P3.25
NULL_H: P3.24 U1.87 | length 64.7
  Top Layer w0.254: U1.87@127.477,71.374 127.477,84.297 128.215,85.035 128.258,85.035 132.246,89.024 160.32,89.024 165.276,93.98 P3.24
PGEC1: P1.5 U1.27 | length 44
  Top Layer w0.254: v1(120.396,48.514) 120.396,53.086 121.5,54.19 U1.27
  Bottom Layer w0.254: P1.5 104.394,68.326 104.394,57.856 104.394,55.372 108.458,51.308 118.244,51.308 120.396,49.156 v1(120.396,48.514)
PGED1: P1.4 U1.26 | length 45.4
  Top Layer w0.254: v1(119.38,46.99) 119.38,52.832 121,54.452 U1.26
  Bottom Layer w0.254: P1.4 103.498,68.58 103.94,68.138 103.94,55.184 108.22,50.904 118.006,50.904 119.38,49.53 v1(119.38,46.99)
POS_A: P3.55 U1.68 | length 61
  Top Layer w0.254: U1.68 138.376,66 143.771,71.395 143.771,80.017 v1(147.574,83.82)
  Bottom Layer w0.254: v1(147.574,83.82) 147.574,86.706 148.155,87.286 148.155,87.315 149.264,88.424 149.306,88.424 157.186,96.304 166.332,96.304 168.656,93.98 P3.55
POS_B: P3.56 U1.69 | length 60.1
  Top Layer w0.254: U1.69 138.234,66.5 139.916,68.182 143.348,71.614 143.348,81.372 v1(145.796,83.82)
  Bottom Layer w0.254: v1(145.796,83.82) 145.796,85.57 147.701,87.474 147.701,87.503 149.076,88.878 149.118,88.878 156.998,96.758 169.434,96.758 169.672,96.52 P3.56
POS_C: P3.57 U1.70 | length 60.7
  Top Layer w0.254: U1.70 138.092,67 139.462,68.37 142.894,71.802 142.894,80.825 142.894,82.696 v1(144.018,83.82)
  Bottom Layer w0.254: v1(144.018,83.82) 144.018,84.434 147.247,87.662 147.247,87.691 148.888,89.332 148.93,89.332 158.658,99.06 P3.57
POS_D: P3.58 U1.71 | length 62.1
  Top Layer w0.254: U1.71 137.95,67.5 139.008,68.558 142.44,71.99 142.44,83.62 v1(142.24,83.82)
  Bottom Layer w0.254: v1(142.24,83.82) 144.742,86.322 145.264,86.322 146.793,87.851 146.793,87.879 148.7,89.786 148.742,89.786 158.395,99.439 160.556,101.6 166.37,101.6 P3.58
POS_E: P3.59 U1.79 | length 65.5
  Top Layer w0.254: U1.79@131.477,70.799 131.477,82.619 133.604,84.746 133.604,85.744 133.423,85.925 v1(133.604,86.106)
  Bottom Layer w0.254: v1(133.604,86.106) 134.274,86.776 145.076,86.776 146.339,88.039 146.339,88.067 148.512,90.24 148.554,90.24 162.454,104.14 166.37,104.14 P3.59
POS_F: P3.60 U1.80 | length 67.1
  Top Layer w0.254: U1.80@131.023,71.12 131.023,81.627 131.023,83.525 v1(132.461,84.963)
  Bottom Layer w0.254: v1(132.461,84.963) 132.461,86.487 133.204,87.23 134.086,87.23 144.888,87.23 145.885,88.227 145.885,88.255 148.324,90.694 148.366,90.694 164.352,106.68 166.37,106.68 P3.60
POS_G: P3.61 U1.47 | length 125.5
  Top Layer w0.254: U1.47 131.5,53.158 132.588,52.07 v1(132.588,51.562)
  Bottom Layer w0.254: v1(132.588,51.562) 131.318,50.292 120.544,50.292 117.912,52.924 114.97,52.924 114.046,53.848 114.046,80.666 125.074,91.694 128.695,91.694 128.995,91.394 148.424,91.394 166.25,109.22 P3.61
POS_H: P3.62 U1.48 | length 129.9
  Top Layer w0.254: U1.48 132,53.928 133.604,52.324 v1(133.604,50.038)
  Bottom Layer w0.254: v1@133.477,49.911 133.404,49.838 120.356,49.838 117.674,52.52 114.732,52.52 113.642,53.61 113.642,63.125 113.642,80.834 124.906,92.098 128.862,92.098 129.162,91.798 148.186,91.798 168.148,111.76 P3.62
R/W: P4.2 U1.7 | length 69
  Top Layer w0.254: v1(112.014,103.886) 112.014,102.87 113.763,101.121 113.763,69.165 113.754,69.156 113.754,68.499 115.753,66.5 U1.7
  Bottom Layer w0.254: P4.2 102.87,123.19 105.41,123.19 112.014,116.586 v1(112.014,103.886)
RBIAS: R15.2 U2.16 | length 8.7
  Top Layer w0.254: U2.16 149.038,106.62 150.368,107.95 R15.2
RESET: P1.1 R2.1 U1.13 | length 25.2
  Top Layer w0.254: P1.1 105.664,60.96 107.95,63.246 ; R2.1 105.68,66.278 107.95,64.008 107.95,63.246 ; U1.13 112.776,63.5 112.522,63.246 v1(111.76,63.246) 107.95,63.246
RUN: D1.1 U1.64 | length 114.6
  Top Layer w0.254: v1(125.73,90.678) D1.1 ; U1.64 134.623,64.073 139.785,64.073 140.922,65.21 140.922,67.3 144.579,70.957 144.579,75.051 144.579,75.555 145.796,76.771 v1(145.796,79.248)
  Bottom Layer w0.254: v1(125.73,90.678) 125.984,90.678 126.746,89.916 126.746,88.646 124.46,86.36 121.92,86.36 116.586,81.026 116.586,79.248 117.856,77.978 124.206,77.978 128.246,82.018 140.184,82.018 142.954,79.248 v1(145.796,79.248)
SPI_SCK: P2.2 U1.55 | length 85.1
  Top Layer w0.254: v1(112.268,48.514) 112.268,46.482 113.792,44.958 150.182,44.958 151.384,46.16 151.384,57.926 149.833,59.477 147.889,59.477 147.816,59.404 147.698,59.286 146.942,59.286 146.824,59.404 146.751,59.477 146.009,59.477 134.573,59.477 U1.55
  Bottom Layer w0.254: P2.2 105.156,45.466 108.204,48.514 v1(112.268,48.514)
SPI_SDI: P2.3 U1.54 | length 83.4
  Top Layer w0.254: v1(113.284,46.99) 113.284,46.482 114.354,45.412 149.994,45.412 150.93,46.348 150.93,57.738 149.668,59 147.983,59 147.865,58.882 146.775,58.882 146.657,59 145.724,59 U1.54
  Bottom Layer w0.254: P2.3 106.634,49.484 112.822,49.484 113.284,49.022 v1(113.284,46.99)
SPI_SDO: P2.4 U1.53 | length 81
  Top Layer w0.254: v1(114.3,48.514) 114.3,46.482 114.916,45.866 149.806,45.866 150.476,46.536 150.476,57.55 149.549,58.477 145.485,58.477 U1.53@134.573,58.477
  Bottom Layer w0.254: P2.4 104.498,49.888 113.688,49.888 114.3,49.276 v1(114.3,48.514)
SPI_SS: P2.5 U1.23 | length 28.1
  Top Layer w0.254: v1(116.332,48.514) 116.786,48.968 116.786,57.604 117.682,58.5 U1.23
  Bottom Layer w0.254: P2.5 102.362,50.292 114.554,50.292 v1(116.332,48.514)
SYS_CLK: U1.63 U2.33 | length 100.3
  Top Layer w0.254: v1(125.222,88.9) 126.238,88.9 126.746,89.408 126.746,94.694 126.746,105.981 127.385,106.62 U2.33 ; U1.63 138.952,63.5 139.783,63.5 141.326,65.043 141.326,67.132 144.983,70.79 144.983,75.387 146.812,77.216 v1@146.558,77.47
  Bottom Layer w0.254: v1(125.222,88.9) 124.912,89.21 124.751,89.05 123.142,89.05 115.678,81.586 115.678,78.315 117.435,76.558 124.324,76.558 128.862,81.096 139.751,81.096 144.339,76.508 145.85,76.508 v1(146.812,77.47)
TP_IN_N: C4.2 R11.2 U2.27 | length 20.2
  Top Layer w0.254: C4.2 v1(137.16,114.3) 138.45,113.01 U2.27 ; R11.2 v1(146.304,118.872)
  Bottom Layer w0.254: v1(137.16,114.3) 141.732,114.3 v1(146.304,118.872)
TP_IN_P: C2.2 R12.2 U2.26 | length 13
  Top Layer w0.254: U2.26 138.95,111.371 139.192,111.613 139.192,115.582 139.688,116.078 142.748,116.078 144.002,117.332 R12.2
TPOUT1_N: P5.2 R13.2 U2.31 | length 34.8
  Top Layer w0.254: v1(135.382,111.506) 135.478,111.602 136.452,110.628 U2.31@136.452,108.618 ; P5.2 150.622,123.063 R13.2
  Bottom Layer w0.254: v1(135.382,111.506) 135.382,112.014 135.89,112.522 137.922,112.522 138.684,111.76 138.684,110.998 139.138,110.544 143.056,110.544 150.495,117.983 P5.2
TPOUT1_P: P5.1 R14.2 U2.30 | length 37.8
  Top Layer w0.254: U2.30 136.95,111.042 137.3,111.392 v1(137.414,111.506) ; P5.1 151.765,120.523 152.654,119.634 R14.2
  Bottom Layer w0.254: v1(137.414,111.506) 138.83,110.09 143.618,110.09 151.765,118.237 P5.1
VCAP: C5.1 U2.63 | length 5.3
  Top Layer w0.254: U2.63 142.95,94.794 143.764,93.98 C5.1
VCC: C48.1 C49.1 C50.1 C51.1 C52.1 C53.1 C54.1 D7.2 P1.2 P2.1 P4.19 R1.2 R4.1 R5.2 R13.1 R14.1 U1.2 U1.16 U1.30 U1.37 U1.46 U1.62 U1.86 U2.4 U2.21 U2.22 U2.25 U2.28 U2.47 U2.64 U8.4 | length 331.3
  Top Layer w0.254: 104.14,63.5 104.14,72.433 D7.2 ; D7.2@105.68,74.073 R1.2 ; U1.16 120.928,62 121.92,62.992 v1(121.92,63.5) ; U1.2 121.5,69 v1(121.92,68.58) ; v1(121.92,58.42) 123,57.34 U1.30 ; U1.37 126.5,57.92 v1(127,58.42) ; v1(127,68.58) 128,69.58 U1.86 ; C53.1@129.62,98.218 129.968,98.218 131.37,99.62 132.64,99.62 U2.47 ; U1.46 131,57.34 v1(132.08,58.42) ; v1@132.08,63 U1.62 ; U2.28 137.95,106.652 v1(138.684,105.918) 139.45,106.684 U2.25 ; U2.22 140.95,106.152 v1(140.716,105.918) 141.45,106.652 U2.21 ; U2.64 143.45,99.12 v1(142.748,99.822) 143.546,100.62 U2.4 ; R13.1 R14.1 153.146,115.824 157.242,115.824 R5.2 ; v1(152.713,113.558) R14.1@152.713,115.332
  Top Layer w0.5: v1(138.684,105.918) v1@138.9,106.134 ; v1(142.748,99.822) 142.966,99.822 v1@142.966,100.04
  Top Layer w1: P2.1@101.6,39.33 106.426,39.33 ; P1.2 104.14,63.5 v1(106.426,63.5) ; 104.14,39.33 106.426,39.33 ; v1(115.062,56.388) v1(106.426,56.388) 106.426,39.33 ; C53.1@129.62,98.218 129.794,98.044 129.794,95.504 v1(131.318,95.504) ; v1(147.574,108.458) C52.1 ; C48.1 146.7,39.33 134.04,26.67 121.38,39.33 106.426,39.33
  Bottom Layer w1: P4.19 105.41,106.68 106.426,105.664 106.426,95.504 ; v1(106.426,56.388) v1(106.426,63.5) 106.426,95.504 ; v1(115.062,56.388) 119.888,56.388 v1(121.92,58.42) ; v1(121.92,63.5) C49.1 ; v1(127,58.42) C50.1 ; v1(127,68.58) C54.1 123.618,70.278 v1(121.92,68.58) 120.222,66.882 C49.1 ; v1(132.08,63.5) 133.524,63.5 C51.1@133.778,63.754 ; C51.1 133.524,63.246 133.524,59.864 v1(132.08,58.42) 130.382,56.722 C50.1 ; v1(138.684,105.918) v1(140.716,105.918) 143.256,108.458 145.034,108.458 ; v1(152.713,113.558) 147.614,108.458 v1(147.574,108.458) 145.034,108.458 ; 106.426,95.504 138.43,95.504 v1(142.748,99.822) 145.034,102.108 145.034,108.458 ; C49.1 120.222,60.118 v1(121.92,58.42) ; v1(121.92,58.42) 123.618,56.722 C50.1
VDD_CORE: C3.2 U1.85 | length 4.8
  Top Layer w0.254: U1.85 128.5,69.62 v1(129.54,68.58)
  Bottom Layer w0.254: v1(129.54,68.58) 129.54,69.77 C3.2
pads on no net: D7.3 P1.6 P4.7 P4.9 P5.4 P5.5 P5.15 P5.16 U1.19 U1.28 U1.49 U1.66

## Polygon pours and split planes (outlines as drawn)
VCC on Top Layer "Bottom Layer-No Net" (solid, remove dead copper, pour order 1000): 111.76,38.1 114.3,40.64 144.78,40.64 147.32,38.1 147.32,20.32 144.78,17.78 114.3,17.78 111.76,20.32
GND on Top Layer "Top Layer-No Net" (solid, remove dead copper, pour order 1003): 96.52,139.7 177.8,139.7 177.8,116.84 170.18,116.84 170.18,30.48 177.8,30.48 177.8,15.24 96.52,15.24
GND on Top Layer "Top Layer-No Net" (solid, pour order 1001): 133.35,69.85 133.35,80.01 134.366,81.026 140.462,81.026 140.716,81.026 141.732,80.01 141.732,72.39 137.668,68.326 133.604,68.326 133.35,68.326
GND on Bottom Layer "Top Layer-No Net" (solid, remove dead copper, pour order 1006): 96.52,139.7 96.52,15.24 177.8,15.24 177.8,30.48 170.18,30.48 170.18,116.84 177.8,116.84 177.8,139.7
GND on Bottom Layer "Top Layer-No Net" (solid, pour order 1004): 133.35,80.01 134.366,81.026 140.716,81.026 141.732,80.01 141.732,72.39 137.668,68.326 133.35,68.326

## Silkscreen, mask and mechanical layers (free items; w line width, h text height)
Top Overlay:
  lines w0.254: 96.52,12.446 96.52,12.954 ; 98.044,12.192 96.52,12.7 ; 98.044,13.208 96.52,12.7 ; 130.025,12.7 96.52,12.7 ; 144.295,12.7 177.8,12.7 ; 176.276,12.192 177.8,12.7 ; 176.276,13.208 177.8,12.7 ; 177.8,12.446 177.8,12.954 ; 182.372,16.764 182.88,15.24 ; 182.372,138.176 182.88,139.7 ; 182.626,15.24 183.134,15.24 ; 182.626,139.7 183.134,139.7 ; 182.88,69.573 182.88,15.24 ; 182.88,85.367 182.88,139.7 ; 183.388,16.764 182.88,15.24 ; 183.388,138.176 182.88,139.7
  text "124.46 (mm)" at 183.794,69.827 h1.52 r90
  text "81.28 (mm)" at 130.279,11.786 h1.52

## Text inside footprints (layer, text, board x,y; h text height)
C47: Top Overlay "+" at 158,41.38 h1.5 r270
C48: Top Overlay "+" at 150.38,41.38 h1.5 r270
P4: Top Overlay "20" at 103.632,102.616 h1.27 r270; Top Overlay "10" at 101.092,102.616 h1.27 r270; Top Overlay "1" at 103.632,129.032 h1.27 r270; Top Overlay "1" at 103.632,130.048 h1.27 r270; Top Overlay "1" at 100.584,129.032 h1.27 r270